# EAGLE board fretscanner5000-osh (EAGLE 6.6.0)
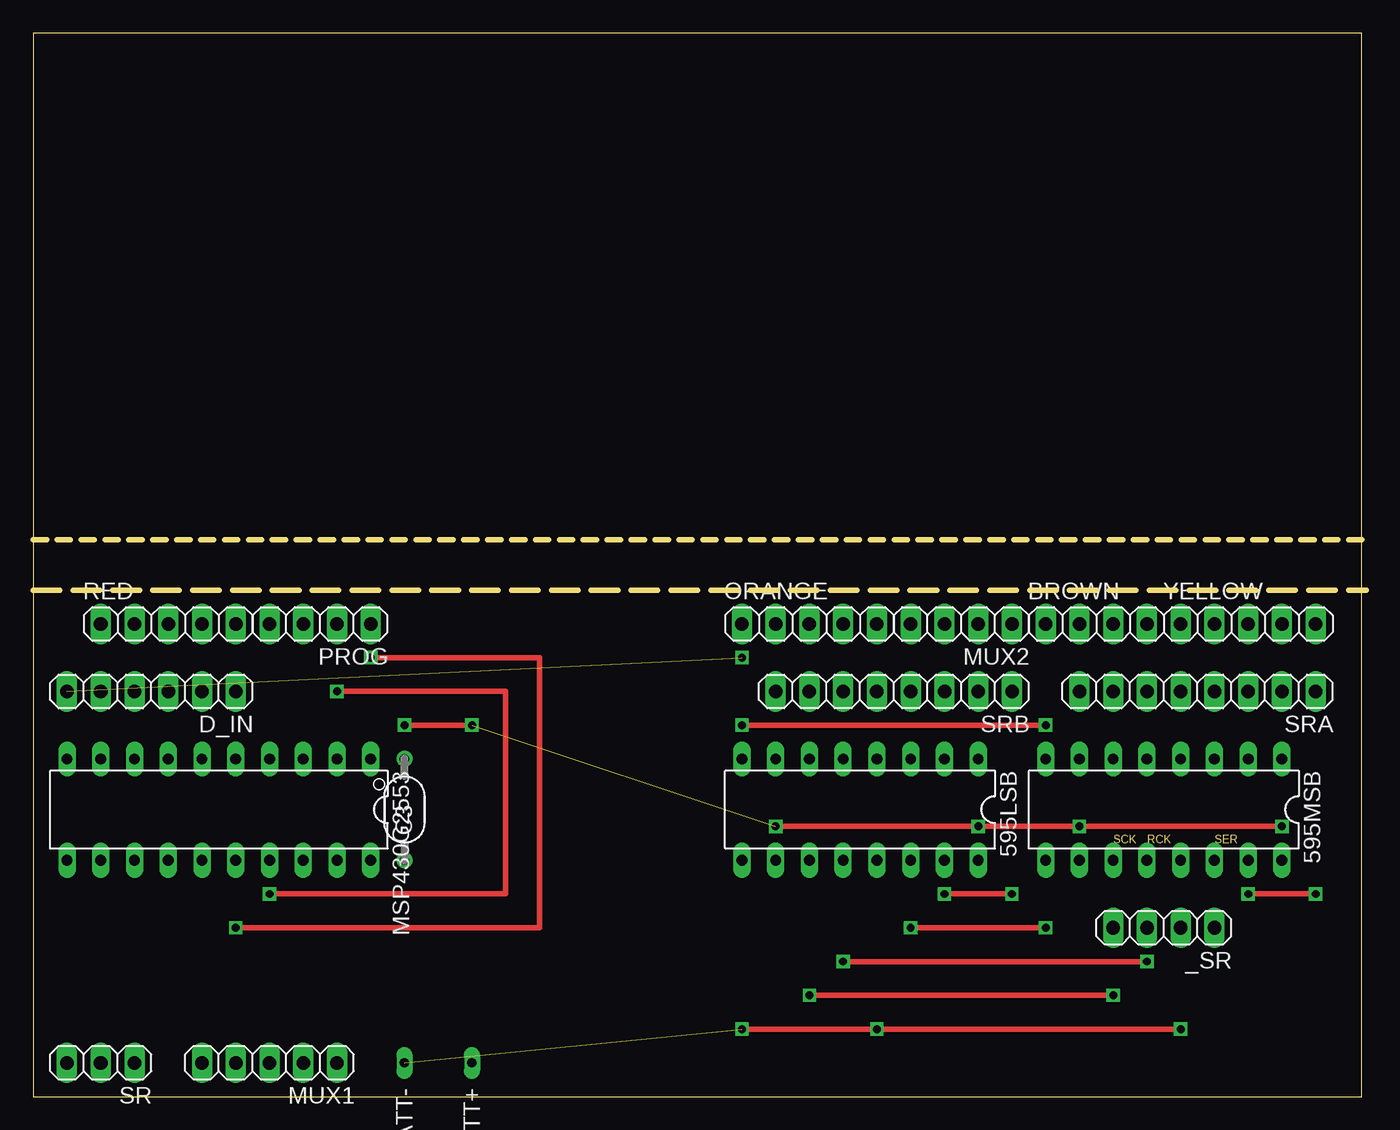
[diagram p0: board, top side]
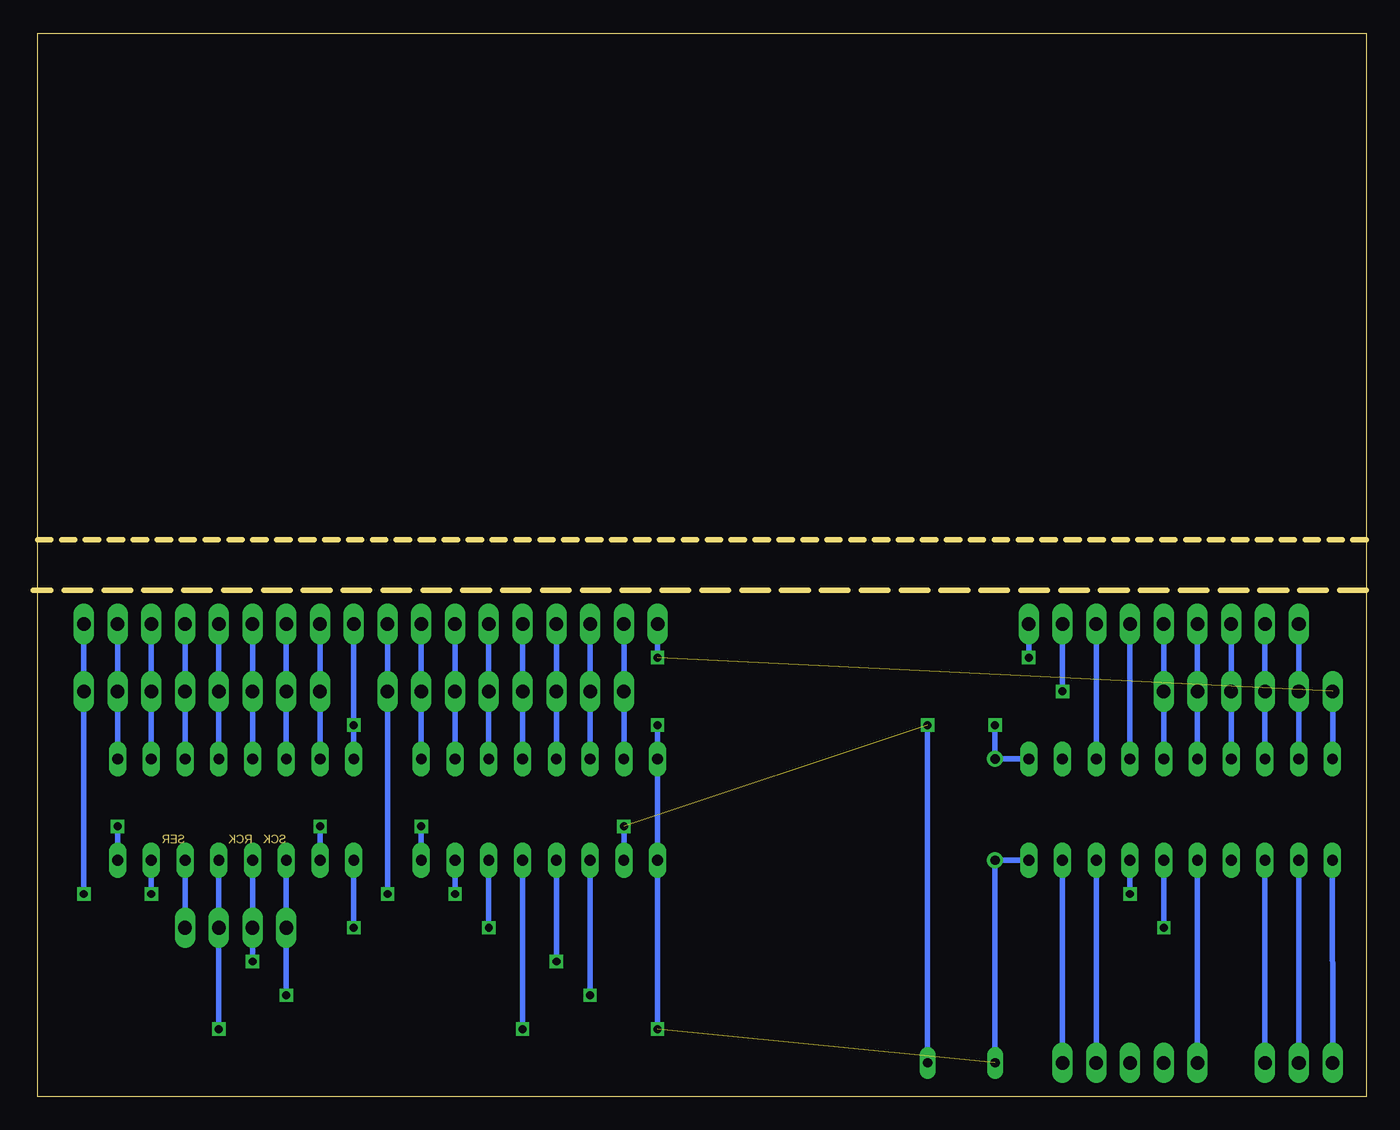
[diagram p1: board, bottom side, seen from below]

Size 100.33 x 80 mm. Coordinates in mm from the lower left corner, seen from the top.
Outline: 0,41.91 0,80 100,80 100,0 0,0 0,38.1
Outline: 0,41.91 0,38.1
Outline: 0,41.91 100.33,41.91
Outline: 0,38.1 0.64,38.1
Outline: 0,38.1 100.33,38.1
Copper layers (1*16): Top 0.035mm / dielectric 1.5mm / Bottom 0.035mm
Design rules "default": minimum track width 10mil, minimum drill 24mil, track to track 8mil, track to pad 8mil, pad to pad 8mil, via to via 8mil, smd to smd 8mil, copper to edge 40mil, drill to drill 8mil, minimum pad ring 10mil, minimum via ring 8mil, stop-mask expansion 4mil, vias tented up to drill 0mil, thermal gap 10mil

## Footprints (pad centres in the part's own frame; a part is rotated, then mirrored left to right if it is on the bottom)
DIL16 = drill 0.813 long: 1 -8.89,-3.81; 2 -6.35,-3.81; 3 -3.81,-3.81; 4 -1.27,-3.81; 5 1.27,-3.81; 6 3.81,-3.81; 7 6.35,-3.81; 8 8.89,-3.81; 9 8.89,3.81; 10 6.35,3.81; 11 3.81,3.81; 12 1.27,3.81; 13 -1.27,3.81; 14 -3.81,3.81; 15 -6.35,3.81; 16 -8.89,3.81
1X04 = drill 1.016 long: 1 -3.81,0; 2 -1.27,0; 3 1.27,0; 4 3.81,0
LONG = drill 0.7 long: 1 0,0
050X030_050_3 = drill 0.7: 1 -3.81,0; 2 3.81,0
DO41-4 = drill 0.9: A 5.08,0 | drill 0.9 square: C -5.08,0
DO35-2 = drill 0.9: A 2.54,0 | drill 0.9 square: C -2.54,0
1X06 = drill 1.016 long: 1 -6.35,0; 2 -3.81,0; 3 -1.27,0; 4 1.27,0; 5 3.81,0; 6 6.35,0
1X05 = drill 1.016 long: 1 -5.08,0; 2 -2.54,0; 3 0,0; 4 2.54,0; 5 5.08,0
1X01 = drill 1.016 octagon: 1 0,0
1X08 = drill 1.016 long: 1 -8.89,0; 2 -6.35,0; 3 -3.81,0; 4 -1.27,0; 5 1.27,0; 6 3.81,0; 7 6.35,0; 8 8.89,0
N20 = drill 0.813 long: 1 -11.435,-3.81; 2 -8.895,-3.81; 3 -6.355,-3.81; 4 -3.815,-3.81; 5 -1.275,-3.81; 6 1.265,-3.81; 7 3.805,-3.81; 8 6.345,-3.81; 9 8.885,-3.81; 10 11.425,-3.81; 11 11.425,3.81; 12 8.885,3.81; 13 6.345,3.81; 14 3.805,3.81; 15 1.265,3.81; 16 -1.275,3.81; 17 -3.815,3.81; 18 -6.355,3.81; 19 -8.895,3.81; 20 -11.435,3.81
1X02 = drill 1.016 long: 1 -1.27,0; 2 1.27,0
TO92- = drill 0.7 octagon: 1 2.54,0; 2 0,0; 3 -2.54,0
R0207/1V = drill 0.7: 1 -1.27,0; 2 1.27,0
R0207/3 = drill 0.7: 1 -3.81,0; 2 3.81,0
1X03 = drill 1.016 long: 1 -2.54,0; 2 0,0; 3 2.54,0

## Placement (x,y rotation side)
595LSB  74LS595N  [DIL16]  62.23,21.59 180 top
595MSB  74LS595N  [DIL16]  85.09,21.59 180 top
_SR  [1X04]  85.09,12.7 180 top
BATT+  [LONG]  33.02,2.54 270 top
BATT-  [LONG]  27.94,2.54 270 top
BLUE  [1X04]  -19.05,57.15 0 top  (outside the outline)
BROWN  [1X04]  80.01,35.56 0 top
C3  100n  [050X030_050_3]  27.94,21.59 90 top
C4  100n  [050X030_050_3]  -80.01,58.42 0 top  (outside the outline)
C5  100n  [050X030_050_3]  -17.78,64.77 0 top  (outside the outline)
D1  [DO41-4]  -78.74,-7.62 0 top  (outside the outline)
D4  1N4148-2  [DO35-2]  -39.37,69.85 0 top  (outside the outline)
D7  1N4148-2  [DO35-2]  -69.85,69.85 0 top  (outside the outline)
D_IN  [1X06]  8.89,30.48 180 top
DPAD  [1X05]  -20.32,50.8 0 top  (outside the outline)
DPAD2  [1X01]  -66.04,62.23 0 top  (outside the outline)
JP5  [1X08]  -67.31,38.1 0 top  (outside the outline)
JP6  [1X08]  -24.13,44.45 0 top  (outside the outline)
MSP430G2553  G2XX3---N20  [N20]  13.97,21.59 180 top
MUX1  [1X05]  17.78,2.54 180 top
MUX2  [1X04]  69.85,35.56 180 top
MUXA  4051N  [DIL16]  -46.99,22.86 0 top  (outside the outline)
MUXB  4051N  [DIL16]  -69.85,22.86 0 top  (outside the outline)
ORANGE  [1X05]  58.42,35.56 0 top
POTS  [1X05]  -48.26,50.8 0 top  (outside the outline)
POTS2  [1X02]  -40.64,57.15 0 top  (outside the outline)
PROG  [1X04]  21.59,35.56 180 top
Q3  2N3904  [TO92-]  -35.56,33.02 0 top  (outside the outline)
R5  300k  [R0207/1V]  -45.72,63.5 0 top  (outside the outline)
R6  1k  [R0207/3]  -78.74,74.93 0 top  (outside the outline)
R16  30k  [R0207/3]  -78.74,80.01 0 top  (outside the outline)
R19  30k  [R0207/3]  -38.1,85.09 0 top  (outside the outline)
RED  [1X05]  10.16,35.56 0 top
SR  [1X03]  5.08,2.54 180 top
SRA  [1X08]  87.63,30.48 180 top
SRB  [1X08]  64.77,30.48 180 top
YELLOW  [1X05]  91.44,35.56 0 top

## Library data of the parts
595LSB 595MSB = 74xx-us
_SR BLUE BROWN D_IN DPAD DPAD2 JP5 JP6 MUX1 MUX2 ORANGE POTS POTS2 PROG RED SR SRA SRB YELLOW = pinhead
BATT+ BATT- = gm-supply
C3-C5 = gm-caps-ceramic
D1 D4 D7 = gm-diodes
MSP430G2553 = TI_MSP430_v16
MUXA MUXB = 40xx
Q3 = gm-trans
R5 R6 R16 R19 = gm-resistors

## Nets
_RST: MSP430G2553.16 PROG.1
BACK: POTS.4
D0: D_IN.1 MSP430G2553.5 RED.5
D1: D_IN.2 MSP430G2553.6 RED.4
D2: D_IN.3 MSP430G2553.7 RED.3
D3: D_IN.4 MSP430G2553.8 RED.2
D4: D_IN.5 MSP430G2553.9 RED.1
D5: D_IN.6 MSP430G2553.10 ORANGE.1
D_DOWN: DPAD.1
D_LEFT: DPAD.2
D_RIGHT: DPAD.3
D_UP: DPAD.4
GND: 595LSB.8 595LSB.13 595MSB.8 595MSB.13 BATT-.1 BROWN.1 C3.1 MSP430G2553.20
INH_A: MSP430G2553.18 MUX1.2
INH_B: MSP430G2553.19 MUX1.1
JOY_X: BLUE.2
JOY_Y: BLUE.4
M_F1: 595MSB.1 SRA.2 YELLOW.4
M_F2: 595MSB.2 SRA.3 YELLOW.3
M_F3: 595MSB.3 SRA.4 YELLOW.2
M_F4: 595MSB.4 SRA.5 YELLOW.1
M_F5: 595LSB.4 ORANGE.5 SRB.5
M_F6: 595LSB.5 ORANGE.4 SRB.6
M_F7: 595LSB.6 ORANGE.3 SRB.7
M_F8: 595LSB.7 ORANGE.2 SRB.8
M_F9: 595MSB.5 BROWN.4 SRA.6
M_F10: 595MSB.15 SRA.1 YELLOW.5
M_F11: 595MSB.6 BROWN.3 SRA.7
M_F12: 595MSB.7 BROWN.2 SRA.8
N$1: 595LSB.14 595MSB.9
N$2: 595LSB.15 MUX2.1 SRB.1
N$3: 595LSB.1 MUX2.2 SRB.2
N$4: 595LSB.2 MUX2.3 SRB.3
N$5: Q3.2 R5.1 R6.2
N$6: 595LSB.3 MUX2.4 SRB.4
N$7: C5.1 MUXA.16
N$8: D4.A R16.2
N$9: C4.1 MUXB.16
N$10: D4.C D7.C R6.1
N$11: C4.2 MUXB.7 MUXB.8
N$12: C5.2 MUXA.7 MUXA.8
N$13: Q3.3 R5.2
N$21: D7.A R19.2
N$26: MSP430G2553.15 MUX1.5
N$27: 595MSB.14 _SR.1
N$28: 595LSB.11 595MSB.11 _SR.4
N$29: 595LSB.12 595MSB.12 _SR.3
ORNG: POTS2.2
POT_A: POTS.2
POT_B: POTS.1
RCK: MSP430G2553.13 SR.1
RXD: MSP430G2553.3 PROG.3
SCK: MSP430G2553.12 SR.2
SER: MSP430G2553.11 SR.3
SIDE_B: POTS.5
SR0: MUXA.11 MUXB.11
SR1: MUXA.10 MUXB.10
SR2: MUXA.9 MUXB.9
START: POTS.3
TEST: MSP430G2553.17 PROG.2
TXD: MSP430G2553.4 PROG.4
VA: 595LSB.10 595LSB.16 595MSB.10 595MSB.16 BATT+.1 C3.2 MSP430G2553.1
X_BUTTON: DPAD.5

## Tracks (layer width: path | path; a pad name or v marks a point on that pad's centre or on a via)
_RST  (via drill 0.6)
  Top 0.406: v15.24,12.7 38.1,12.7 38.1,33.02 v25.4,33.02
  Bottom 0.406: MSP430G2553.16 v15.24,12.7 | v25.4,33.02 PROG.1
D0
  Bottom 0.406: MSP430G2553.5 15.24,27.95 D_IN.1 RED.5
D1
  Bottom 0.406: MSP430G2553.6 12.7,27.95 D_IN.2 RED.4
D2
  Bottom 0.406: MSP430G2553.7 10.16,27.95 D_IN.3 RED.3
D3
  Bottom 0.406: MSP430G2553.8 7.62,27.95 D_IN.4 RED.2
D4
  Bottom 0.406: MSP430G2553.9 5.08,27.95 D_IN.5 RED.1
D5  (via drill 0.6)  (1 unrouted)
  Bottom 0.406: MSP430G2553.10 2.54,27.95 D_IN.6 MSP430G2553.10 | v53.34,33.02 ORANGE.1
GND  (via drill 0.6)  (1 unrouted)
  Top 0.406: v53.34,5.08 v63.5,5.08 v86.36,5.08 | v76.2,27.94 v53.34,27.94
  Bottom 0.406: MSP430G2553.20 C3.1 BATT-.1 | 76.2,33.02 BROWN.1 v76.2,27.94 595MSB.8 | 595LSB.13 v63.5,5.08 | v86.36,5.08 595MSB.13 | v53.34,27.94 595LSB.8 v53.34,5.08
INH_A
  Bottom 0.406: MSP430G2553.18 MUX1.2
INH_B
  Bottom 0.406: MUX1.1 MSP430G2553.19
M_F1
  Bottom 0.406: 595MSB.1 SRA.2 YELLOW.4
M_F2
  Bottom 0.406: 595MSB.2 SRA.3 YELLOW.3
M_F3
  Bottom 0.406: 595MSB.3 SRA.4 YELLOW.2
M_F4
  Bottom 0.406: 595MSB.4 SRA.5 YELLOW.1
M_F5
  Bottom 0.406: 595LSB.4 SRB.5 ORANGE.5
M_F6
  Bottom 0.406: 595LSB.5 SRB.6 ORANGE.4
M_F7
  Bottom 0.406: 595LSB.6 SRB.7 ORANGE.3
M_F8
  Bottom 0.406: 595LSB.7 SRB.8 ORANGE.2
M_F9
  Bottom 0.406: 595MSB.5 SRA.6 BROWN.4
M_F10  (via drill 0.6)
  Top 0.406: v96.52,15.24 v91.44,15.24
  Bottom 0.406: YELLOW.5 SRA.1 v96.52,15.24 | v91.44,15.24 595MSB.15
M_F11
  Bottom 0.406: 595MSB.6 SRA.7 BROWN.3
M_F12
  Bottom 0.406: 595MSB.7 SRA.8 BROWN.2
N$1  (via drill 0.6)
  Top 0.406: v66.04,12.7 v76.2,12.7
  Bottom 0.406: 595LSB.14 v66.04,12.7 | v76.2,12.7 595MSB.9
N$2  (via drill 0.6)
  Top 0.406: v73.66,15.24 v68.58,15.24
  Bottom 0.406: v73.66,15.24 SRB.1 MUX2.1 | v68.58,15.24 595LSB.15
N$3
  Bottom 0.406: 595LSB.1 SRB.2 MUX2.2
N$4
  Bottom 0.406: 595LSB.2 SRB.3 MUX2.3
N$5  (2 unrouted)
N$6
  Bottom 0.406: 595LSB.3 SRB.4 MUX2.4
N$7  (1 unrouted)
N$8  (1 unrouted)
N$9  (1 unrouted)
N$10  (2 unrouted)
N$11  (2 unrouted)
N$12  (2 unrouted)
N$13  (1 unrouted)
N$21  (1 unrouted)
N$26
  Bottom 0.406: MUX1.5 MSP430G2553.15
N$27
  Bottom 0.406: 595MSB.14 _SR.1
N$28  (via drill 0.6)
  Top 0.406: v58.42,7.62 v81.28,7.62
  Bottom 0.406: _SR.4 v81.28,7.62 595MSB.11 | v58.42,7.62 595LSB.11
N$29  (via drill 0.6)
  Top 0.406: v60.96,10.16 v83.82,10.16
  Bottom 0.406: _SR.3 v83.82,10.16 595MSB.12 | v60.96,10.16 595LSB.12
RCK
  Bottom 0.406: SR.1 MSP430G2553.13
RXD
  Bottom 0.406: MSP430G2553.3 20.32,27.95 PROG.3
SCK
  Bottom 0.406: MSP430G2553.12 SR.2
SER
  Bottom 0.406: MSP430G2553.11 SR.3
SR0  (1 unrouted)
SR1  (1 unrouted)
SR2  (1 unrouted)
TEST  (via drill 0.6)
  Top 0.406: v17.78,15.24 35.56,15.24 35.56,30.48 v22.86,30.48
  Bottom 0.406: MSP430G2553.17 v17.78,15.24 | v22.86,30.48 PROG.2
TXD
  Bottom 0.406: MSP430G2553.4 17.78,27.95 PROG.4
VA  (via drill 0.6)  (1 unrouted)
  Top 0.406: v93.98,20.32 v78.74,20.32 v71.12,20.32 v55.88,20.32 | v33.02,27.94 v27.94,27.94
  Bottom 0.406: MSP430G2553.1 C3.2 v27.94,27.94 | v55.88,20.32 595LSB.10 | v71.12,20.32 595LSB.16 | 595MSB.10 v78.74,20.32 | 595MSB.16 v93.98,20.32 | BATT+.1 v33.02,27.94

## Text on the board
Dimension: SCK | RCK | SER
Document: Cut socket pin to break connection / and allow ground trace to run / under unused pin